# Altium PCB STM32F105 Devlopment Board.PcbDoc (part 2 of 2)
Units mm, origin at the board's own origin, x right, y up, seen from the top; angles counter-clockwise.
Board outline 85.07 x 64.6 mm, 4 copper layers (Signal, Int1 (GND), Int2 (PWR), GND), stack 1.371 mm thick; 98 components, 96 nets, 423 pads, 352 vias.
Unrouted connection lines stored in the file: 251.
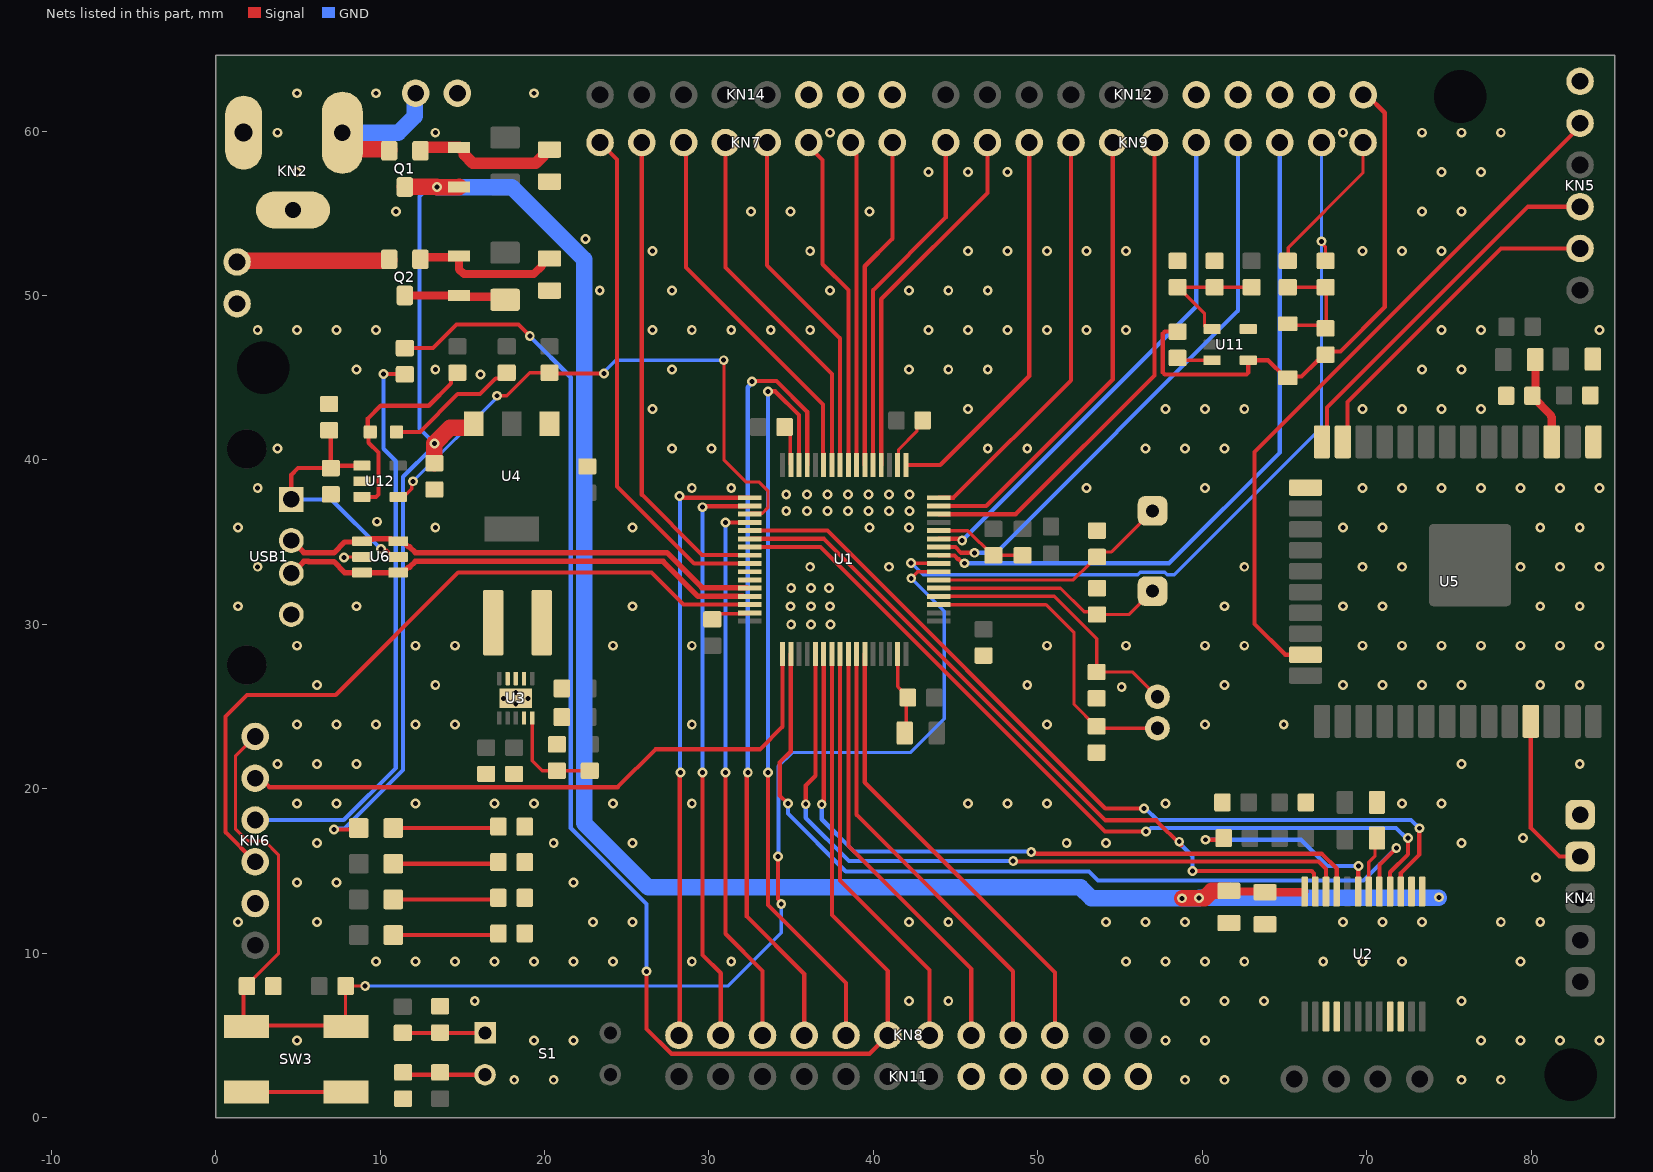
[diagram p4: the nets of this part, all layers, seen from the top]

## Via types
v1: diameter 0.6, hole 0.3, Signal to GND, 352 vias

## Nets (pads, with @x,y where several pads share a name; then routed paths per layer and width w, separated by ;. In a path a pad name is that pad's centre, name@x,y a point inside that pad or via, vN(x,y) a via of type N, cw(c..) or ccw(c..) an arc to the next point about the centre after c; other vN are vias at no path point) (continued)
ESP_TDI: KN5.4 U5.14 | length 22.7
  Signal w0.254: U5.14@67.28,41.1 67.58,41.4 67.58,43.18 79.8,55.4 KN5.4@82.975,55.4
ESP_TDO: KN5.2 U5.23 | length 42.5
  Signal w0.254: U5.23@66.28,28.155 65.045,28.155 63.183,30.017 63.183,40.483 82.975,60.275 KN5.2@82.975,60.48
ESP_TMS: KN5.5 U5.13 | length 20.6
  Signal w0.254: U5.13@68.55,41.1 68.823,41.373 68.823,43.523 78.16,52.86 KN5.5@82.975,52.86
ESP_TX: KN4.4 U5.35 | length 10.2
  Signal w0.254: U5.35@79.98,24.1 79.98,17.62 81.72,15.88 KN4.4@82.975,15.88
GND: C1.1 C2.1 C3.1 C4.1 C5.1 C6.1 C7.1 C8.1 C9.1 C10.1 C11.2 C12.2 C13.1 C14.1 C15.1 C16.1 C17.1 C18.1 C19.1 C20.1 C21.1 C22.1 C23.1 C24.1 C25.1 C26.1 C27.1 C30.1 C33.1 KN2.2 KN2.3 KN3.2 KN4.5 KN5.1 KN6.5 KN10.2 KN11.8 KN11.9 KN11.10 KN11.11 KN11.12 KN12.7 KN12.8 KN12.9 KN12.10 KN14.6 KN14.7 KN14.8 R1.1 R4.1 R6.1 R8.1 R9.1 R10.1 R11.1 R17.1 R18.1 R20.2 R22.2 R32.1 SW3.1 SW3.3 U1.12 U1.18 U1.31 U1.47 U1.63 U2.3 U2.4 U2.9 U2.10 U2.18 U3.3 U3.9 U3.11 U3.12 U3.13 U3.14 U3.15 U4.1 U5.1 U5.15 U6.2 U11.5 U12.2 USB1.4 | length 29.7
  Signal w0.2: v1(7.8,34.067) 7.833,34.1 U6.2@8.9,34.1 ; C4.1@30.2,30.3 30.55,30.65 32.425,30.65 U1.47@32.475,30.7 ; C6.1@34.6,42 34.937,41.663 34.937,39.737 U1.31@34.975,39.7 ; U1.63@41.475,28.2 41.475,26.215 42.1,25.59 C5.1@42.1,25.54 42,25.44 42,23.49 C8.1@41.9,23.39 ; U1.18@41.475,39.7 41.525,39.75 41.525,40.615 42.647,41.737 42.647,42.047 C3.1@43,42.4 ; U1.12@43.975,35.7 45.75,35.7 47.25,34.2 C10.1@47.3,34.2 C9.1@49.077,34.2 ; U2.18@70.125,13.75 70.125,15.525 70.5,15.9 70.5,16.875 C22.1@70.625,17
  Signal w0.254: SW3.3@1.875,1.55 SW3.1@7.925,1.55
  other v1: 18.155,2.3 20.555,2.3 58.955,2.3 61.355,2.3 75.755,2.3 78.155,2.3 4.955,4.7 19.355,4.7 21.755,4.7 57.755,4.7 60.155,4.7 76.955,4.7 79.355,4.7 81.755,4.7 84.155,4.7 15.755,7.1 42.155,7.1 44.555,7.1 58.955,7.1 61.355,7.1 63.755,7.1 75.755,7.1 9.755,9.5 12.155,9.5 14.555,9.5 16.955,9.5 19.355,9.5 21.755,9.5 24.155,9.5 28.955,9.5 31.355,9.5 55.355,9.5 57.755,9.5 60.155,9.5 62.555,9.5 67.355,9.5 69.755,9.5 72.155,9.5 79.355,9.5 1.355,11.9 6.155,11.9 22.955,11.9 25.355,11.9 42.155,11.9 44.555,11.9 54.155,11.9 56.555,11.9 58.955,11.9 68.555,11.9 70.955,11.9 73.355,11.9 78.155,11.9 80.555,11.9 4.955,14.3 7.355,14.3 21.755,14.3 80.3,14.6 6.155,16.7 20.555,16.7 25.355,16.7 51.755,16.7 54.155,16.7 75.755,16.7 79.5,17 4.955,19.1 7.355,19.1 12.155,19.1 16.955,19.1 19.355,19.1 24.155,19.1 28.955,19.1 45.755,19.1 48.155,19.1 50.555,19.1 57.755,19.1 72.155,19.1 74.555,19.1 3.755,21.5 6.155,21.5 8.555,21.5 75.755,21.5 82.955,21.5 4.955,23.9 7.355,23.9 9.755,23.9 12.155,23.9 14.555,23.9 28.955,23.9 50.555,23.9 60.155,23.9 64.955,23.9 55.1,26.2 6.155,26.3 13.355,26.3 49.355,26.3 61.355,26.3 68.555,26.3 70.955,26.3 73.355,26.3 75.755,26.3 80.555,26.3 82.955,26.3 4.955,28.7 12.155,28.7 14.555,28.7 24.155,28.7 28.955,28.7 50.555,28.7 55.355,28.7 60.155,28.7 62.555,28.7 69.755,28.7 72.155,28.7 74.555,28.7 76.955,28.7 79.355,28.7 81.755,28.7 84.155,28.7 35,30 36.2,30 37.4,30 1.355,31.1 8.555,31.1 25.355,31.1 34.955,31.1 36.2,31.1 37.355,31.1 61.355,31.1 68.555,31.1 70.955,31.1 80.555,31.1 82.955,31.1 35,32.2 36.2,32.2 37.3,32.2 2.555,33.5 36.155,33.5 40.955,33.5 62.555,33.5 69.755,33.5 72.155,33.5 79.355,33.5 81.755,33.5 84.155,33.5 1.355,35.9 13.355,35.9 25.355,35.9 39.755,35.9 42.155,35.9 68.555,35.9 70.955,35.9 80.555,35.9 82.955,35.9 9.806,36.243 34.7,36.9 35.95,36.9 37.2,36.9 38.45,36.9 39.7,36.9 40.95,36.9 42.2,36.9 34.7,37.9 35.95,37.9 37.2,37.9 38.45,37.9 39.7,37.9 40.95,37.9 42.2,37.9 2.555,38.3 28.955,38.3 31.355,38.3 52.955,38.3 60.155,38.3 69.755,38.3 72.155,38.3 74.555,38.3 76.955,38.3 79.355,38.3 81.755,38.3 84.155,38.3 3.755,40.7 27.755,40.7 30.155,40.7 46.955,40.7 49.355,40.7 56.555,40.7 58.955,40.7 61.355,40.7 26.555,43.1 45.755,43.1 57.755,43.1 60.155,43.1 62.555,43.1 69.755,43.1 72.155,43.1 74.555,43.1 76.955,43.1 16.1,45.2 8.555,45.5 13.355,45.5 27.755,45.5 42.155,45.5 44.555,45.5 46.955,45.5 73.355,45.5 75.755,45.5 2.555,47.9 4.955,47.9 7.355,47.9 9.755,47.9 26.555,47.9 28.955,47.9 31.355,47.9 33.755,47.9 36.155,47.9 43.355,47.9 45.755,47.9 48.155,47.9 50.555,47.9 52.955,47.9 55.355,47.9 74.555,47.9 76.955,47.9 84.155,47.9 23.357,50.3 27.755,50.3 37.355,50.3 42.155,50.3 44.555,50.3 46.955,50.3 26.555,52.7 36.155,52.7 45.755,52.7 48.155,52.7 50.555,52.7 52.955,52.7 55.355,52.7 69.755,52.7 72.155,52.7 74.555,52.7 22.499,53.444 10.955,55.1 32.555,55.1 34.955,55.1 39.755,55.1 73.355,55.1 75.755,55.1 4.955,57.5 43.355,57.5 45.755,57.5 48.155,57.5 74.555,57.5 76.955,57.5 3.755,59.9 13.355,59.9 37.355,59.9 68.555,59.9 73.355,59.9 75.755,59.9 78.155,59.9 4.955,62.3 9.755,62.3 19.355,62.3
HSE_IN: C11.1 U1.5 X1.1 | length 14.3
  Signal w0.2: U1.5@43.975,32.2 51.378,32.2 52.818,30.76 53.44,30.76 C11.1@53.6,30.6 55.555,30.6 X1.1@56.975,32.02
HSE_OUT: C12.1 U1.6 X1.2 | length 14.7
  Signal w0.2: U1.6@43.975,32.7 52.16,32.7 53.15,33.69 53.15,33.7 53.55,34.1 C12.1@53.6,34.1 53.905,34.405 54.48,34.405 X1.2@56.975,36.9
Li_FB: R6.2 R7.1 U3.10 | length 6.3
  Signal w0.2: U3.10@19.25,24.3 19.25,21.7 19.85,21.1 R6.2@20.75,21.1 R7.1@22.75,21.1
Li_Ion: D1.2 Q2.3 Z2.1 | length 6.2
  Signal w0.5: Q2.3@11.5,50 Z2.1@14.8,50 14.875,49.925 17.415,49.925 D1.2@17.6,49.74
LSE_IN: C13.2 U1.3 X2.1 | length 19
  Signal w0.2: U1.3@43.975,31.2 50.5,31.2 52.2,29.5 52.2,25.125 53.525,23.8 C13.2@53.575,23.8 53.695,23.68 X2.1@57.275,23.68
LSE_OUT: C14.2 U1.4 X2.2 | length 17
  Signal w0.2: U1.4@43.975,31.7 51,31.7 53.575,29.125 C14.2@53.575,27.1 55.775,27.1 X2.2@57.275,25.6
M_DRIV_STBY: R14.1 U2.19 | length 12.7
  Signal w0.254: v1(60.2,16.9) 61.2,16.9 R14.1@61.3,17 ; U2.19@69.475,13.75 69.487,13.763 69.487,15.287 v1(69.5,15.3)
  GND w0.254: v1(60.2,16.9) 66,16.9 67.6,15.3 v1(69.5,15.3)
"Motor Driver EN1": U1.38 U2.23 | length 44.5
  Signal w0.254: U1.38@32.475,35.2 36.993,35.2 54.111,18.082 57.196,18.082 v1@58.725,16.553 ; v1(59.4,15) 66.653,15 66.802,14.851 66.802,13.823 U2.23@66.875,13.75
  GND w0.254: v1@58.7,16.596 59.4,15.896 v1(59.4,15)
  other v1: 58.598,16.781
"Motor Driver EN2": U1.37 U2.15 | length 52.5
  Signal w0.254: U1.37@32.475,35.7 37.208,35.7 54.101,18.807 v1(56.462,18.807) ; U2.15@72.075,13.75 72.075,14.875 73.2,16 v1(73.2,17.6)
  GND w0.254: v1(56.462,18.807) 56.555,18.807 57.263,18.1 72.7,18.1 v1(73.2,17.6)
"Motor Driver IN1": U1.54 U2.21 | length 44
  Signal w0.254: v1@36.975,19.055 U1.54@36.975,28.2 ; v1(49.6,16.157) 49.666,16.09 49.876,16.09 49.922,16.044 67.27,16.044 68.175,15.139 U2.21@68.175,13.75
  GND w0.254: v1(36.856,19.055) 36.856,18.144 38.823,16.177 49.58,16.177 v1(49.6,16.157)
"Motor Driver IN2": U1.53 U2.22 | length 44.5
  Signal w0.254: v1(35.886,19.062) 35.886,20.203 36.475,20.792 U1.53@36.475,28.2 ; v1(48.5,15.6) 48.52,15.58 67.072,15.58 67.525,15.127 U2.22@67.525,13.75
  GND w0.254: v1(35.886,19.062) 35.886,18.234 38.52,15.6 v1(48.5,15.6)
"Motor Driver IN3": U1.50 U2.17 | length 52.8
  Signal w0.254: v1(34.8,19.1) 34.3,19.6 34.3,21.6 34.975,22.275 U1.50@34.975,28.2 ; U2.17@70.775,13.75 70.775,15.375 v1(71.8,16.4)
  GND w0.254: v1(34.8,19.1) 34.8,18.493 38.316,14.977 53.106,14.977 53.66,14.423 69.809,14.423 v1@71.786,16.4
"Motor Driver IN4": U1.39 U2.16 | length 51.2
  Signal w0.254: U1.39@32.475,34.7 36.787,34.7 54.087,17.4 v1(56.576,17.4) ; U2.16@71.425,13.75 71.425,14.925 72.512,16.012 v1@72.512,17
  GND w0.254: v1(56.576,17.4) 56.669,17.4 56.891,17.621 71.785,17.621 72.406,17 v1(72.5,17)
NetC25_2: C25.2 R16.1 U5.3 | length 5.6
  Signal w0.5: R16.1@80.25,46.1 80.262,46.087 80.262,44.088 C25.2@80.075,43.9 80.075,43.85 81.208,42.717 81.208,42.628 81.25,42.586 U5.3@81.25,41.1
NetC33_2: C33.2 R31.1 R32.2 U11.1 | length 8.3
  Signal w0.2: C33.2@58.5,50.5 C33.2@58.55,50.5 ; U11.1@60.631,47.996 U11.1@60.597,47.962 60.332,47.962 60.132,48.162 60.132,48.918 C33.2@58.55,50.5 ; R32.2@60.631,50.381 R32.2@60.75,50.5 ; R31.1@63,50.5 R32.2@60.75,50.5 ; C33.2@58.55,50.5 R32.2@60.75,50.5
NetKN2_1: KN2.1 KN10.1 Q1.2 | length 9.8
  Signal w1: KN2.1@7.7,59.9 7.7,59.593 8.393,58.9 10.55,58.9 Q1.2@10.55,58.8
  GND w1: KN2.1@7.7,59.9 11.1,59.9 12.1,60.9 12.1,62.24 KN10.1@12.16,62.3
NetKN3_1: KN3.1 Q2.2 | length 9.4
  Signal w1: KN3.1@1.3,52.04 1.38,52.12 10.55,52.12 Q2.2@10.55,52.2
NetL2_1: L2.1 U3.4
NetL2_2: L2.2 U3.2
NetLD1_1: LD1.1 R4.2 | length 6.4
  Signal w0.254: LD1.1@10.804,11.1 17.095,11.1 R4.2@17.195,11.2
NetLD3_1: LD3.1 R9.2 | length 6.4
  Signal w0.254: LD3.1@10.804,13.27 17.095,13.27 R9.2@17.195,13.37
NetLD4_1: LD4.1 R10.2 | length 6.4
  Signal w0.254: LD4.1@10.804,17.61 17.106,17.61 R10.2@17.195,17.7
NetLD5_1: LD5.1 R11.2 | length 6.4
  Signal w0.254: LD5.1@10.804,15.44 17.095,15.44 R11.2@17.195,15.54
NetLD8_1: LD8.1 R35.2 U12.3 | length 12.8
  Signal w0.254: U12.3@8.9,37.75 9.751,37.75 9.9,37.899 9.9,40.443 9.3,41.043 9.3,41.6 LD8.1@9.4,41.7 9.252,41.848 9.252,42.513 10.034,43.296 12.955,43.296 14.319,44.659 14.319,44.927 14.692,45.3 R35.2@14.7,45.3
NetLD8_2: LD8.2 R36.2 | length 8.2
  Signal w0.254: LD8.2@11,41.7 12.416,41.7 14.716,44 16.076,44 17.027,44.951 17.351,44.951 R36.2@17.7,45.3
NetQ1_1: Q1.1 R8.2 Z1.2 | length 9.1
  Signal w0.7: Q1.1@12.45,58.8 12.45,58.85 12.6,59 Z1.2@14.8,59 14.825,58.975 15.125,58.975 15.125,58.557 15.634,58.048 19.466,58.048 19.95,58.532 19.95,58.725 20.1,58.875 R8.2@20.3,58.875
NetQ2_1: Q2.1 R1.2 Z2.2 | length 9.4
  Signal w0.5: Q2.1@12.45,52.2 12.575,52.325 14.725,52.325 Z2.2@14.8,52.4 14.8,51.593 15.093,51.3 19.344,51.3 19.85,51.806 19.85,52 20.1,52.25 R1.2@20.3,52.25
NetR3_2: R3.2 R18.2 S1.2A | length 5
  Signal w0.254: R18.2@11.4,2.75 11.54,2.61 S1.2A@16.38,2.61
NetR5_2: R5.2 R17.2 S1.1A | length 5
  Signal w0.254: R5.2@11.375,5.15 S1.1A@16.38,5.15
NetR29_1: pad.6 R29.1 R30.1 U11.4 Z3.2 | length 33.4
  Signal w0.254: R29.1@58.5,47.8 57.717,47.8 57.6,47.683 57.6,45.317 57.717,45.2 62.68,45.2 62.797,45.317 U11.4@62.797,46.062 63.988,46.062 65.05,45 Z3.2@65.2,45 65.269,45.069 66.032,45.069 66.99,46.027 67.127,46.027 67.7,46.6 68.4,46.6 71.1,49.3 71.1,61.114 70.014,62.2 pad.6@69.795,62.2
NetR29_2: R29.2 U11.3 | length 2.2
  Signal w0.2: R29.2@58.5,46.2 58.638,46.062 U11.3@60.597,46.062
NRST: C15.2 KN6.1 R12.1 SW3.2 SW3.4 U1.7 | length 89.9
  Signal w0.2: C15.2@1.9,8 1.9,8.05 3.815,9.965 3.815,16.001 2.992,16.824 1.95,16.824 1.2,17.574 1.2,21.98 KN6.1@2.4,23.18 ; SW3.2@7.925,5.55 7.9,5.575 R12.1@7.9,8 v1(9.092,8) ; v1(42.3,32.8) 42.7,33.2 U1.7@43.975,33.2
  Signal w0.254: SW3.4@1.875,5.55 SW3.4@1.927,5.55 ; C15.2@1.9,8 1.7,7.8 1.7,5.877 1.977,5.6 7.875,5.6 SW3.2@7.9,5.575 ; v1@34.19,15.867 34.19,13.298 34.394,13.094 v1(34.394,13)
  GND w0.2: v1(9.092,8) 31.153,8 34.394,11.241 v1(34.394,13) ; 34.207,21.352 34.223,21.367 35.056,22.2 42.245,22.2 44.3,24.255 44.3,30.8 v1(42.3,32.8)
  GND w0.254: v1(34.198,15.875) 34.223,15.9 34.223,21.367 34.3,21.444
OSC_IN: pad.7 R28.2 | length 9.1
  Signal w0.2: R28.2@65.2,52.1 65.23,52.13 65.23,52.91 69.775,57.455 pad.7@69.775,59.3
OSC_OUT: R28.1 R30.2 R33.2 Z3.1 | length 7.2
  Signal w0.2: Z3.1@65.2,48.277 65.294,48.182 67.318,48.182 R30.2@67.5,48 67.537,48.037 67.537,50.462 R33.2@67.5,50.5 65.25,50.5 R28.1@65.2,50.5
PA0: KN9.5 U1.14 | length 30.8
  Signal w0.254: U1.14@43.982,36.693 48.652,36.693 57.095,45.136 KN9.5@57.095,59.3
PA1: KN9.6 U1.15 | length 28.2
  Signal w0.254: U1.15@43.975,37.2 46.862,37.2 54.555,44.893 KN9.6@54.555,59.3
PA2: KN9.7 U1.16 | length 25.5
  Signal w0.254: U1.16@43.975,37.7 43.978,37.703 44.878,37.703 52.015,44.84 KN9.7@52.015,59.3
PA3: KN9.8 U1.17 | length 23.9
  Signal w0.254: U1.17@41.975,39.7 44.066,39.7 49.475,45.109 KN9.8@49.475,59.3
PA4: KN9.9 U1.20 | length 22.3
  Signal w0.254: U1.20@40.475,39.7 40.475,49.775 46.935,56.235 KN9.9@46.935,59.3
PA5: KN9.10 U1.21 | length 21.4
  Signal w0.254: U1.21@39.975,39.7 39.975,50.313 44.395,54.733 KN9.10@44.395,59.3
PA6: KN7.8 U1.22 | length 20.3
  Signal w0.254: U1.22@39.475,39.7 39.475,51.775 41.155,53.455 KN7.8@41.155,59.3
PA7: KN7.7 U1.23 | length 19.7
  Signal w0.254: KN7.7@38.615,59.3 38.615,58.915 38.972,58.558 U1.23@38.972,39.703
PA8: KN7.1 U1.41 | length 31.3
  Signal w0.254: KN7.1@23.375,59.3 24.41,58.265 24.41,38.39 29.1,33.7 U1.41@32.475,33.7
PB0: KN7.4 U1.26 | length 22.3
  Signal w0.254: KN7.4@30.995,59.3 30.995,51.705 37.475,45.225 U1.26@37.475,39.7
PB1: KN7.3 U1.27 | length 23.1
  Signal w0.254: KN7.3@28.455,59.3 28.6,59.155 28.6,51.7 36.936,43.364 36.936,40.434 36.952,40.418 36.952,39.723 U1.27@36.975,39.7
PB3: KN8.6 R13.1 U1.55 | length 93.9
  Signal w0.254: R13.1@11.5,46.8 13.217,46.8 14.653,48.236 18.41,48.236 v1(19.103,47.543) ; v1(26.2,8.9) 26.2,5.398 27.713,3.885 39.76,3.885 KN8.6@40.875,5 40.875,8.925 37.475,12.325 U1.55@37.475,28.2
  GND w0.254: v1(19.103,47.543) 19.103,47.516 21.592,45.028 21.592,17.61 26.2,13.001 v1(26.2,8.9)
PB4: KN8.7 U1.56 | length 25.5
  Signal w0.254: U1.56@37.975,28.2 37.975,14.425 43.415,8.985 KN8.7@43.415,5
PB5: KN8.8 U1.57 | length 26.3
  Signal w0.254: U1.57@38.475,28.2 38.475,16.525 45.955,9.045 KN8.8@45.955,5
PB6: KN8.9 U1.58 | length 27.1
  Signal w0.254: U1.58@38.975,28.2 38.975,18.425 48.495,8.905 KN8.9@48.495,5
PB7: KN8.10 U1.59 | length 28
  Signal w0.254: U1.59@39.475,28.2 39.475,20.393 51.035,8.833 KN8.10@51.035,5
PB10: KN8.4 U1.29 | length 48.7
  Signal w0.254: v1(32.36,20.995) 32.3,20.936 32.3,12.236 35.795,8.741 KN8.4@35.795,5 ; v1(32.617,44.771) 32.646,44.8 34.1,44.8 35.975,42.925 U1.29@35.975,39.7
  GND w0.254: v1(32.36,20.995) 32.36,44.421 32.617,44.678 v1(32.617,44.771)
PB11: KN8.5 U1.30 | length 46.7
  Signal w0.254: v1(33.583,20.988) 33.583,12.931 38.335,8.179 KN8.5@38.335,5 ; v1(33.583,44.17) 34.03,44.17 35.475,42.725 U1.30@35.475,39.7
  GND w0.254: v1(33.583,20.988) v1(33.583,44.17)
PB12: KN8.1 U1.33 | length 37.2
  Signal w0.254: KN8.1@28.175,5 28.217,5.042 28.217,20.952 v1(28.258,20.994) ; v1(28.2,37.8) 28.294,37.8 28.394,37.7 U1.33@32.475,37.7
  GND w0.254: v1(28.2,37.8) 28.229,37.771 28.229,21.023 v1(28.258,20.994)
PB13: KN8.2 U1.34 | length 35.5
  Signal w0.254: v1(29.6,21) 29.6,9.9 30.715,8.785 KN8.2@30.715,5 ; v1(29.6,37.123) 29.654,37.177 32.452,37.177 U1.34@32.475,37.2
  GND w0.254: v1(29.6,21) v1(29.6,37.123)
PB15: KN8.3 U1.36 | length 33.6
  Signal w0.254: v1@31,21.1 31,11.181 33.255,8.926 KN8.3@33.255,5 ; v1(31,36.2) U1.36@32.475,36.2
  GND w0.254: v1@31,21.1 v1(31,36.2)
  other v1: 31,20.991
PC0: KN9.1 R33.1 U1.8 | length 49.4
  Signal w0.2: v1(42.294,33.741) 42.314,33.721 43.954,33.721 U1.8@43.975,33.7 ; v1(67.255,53.296) 67.255,53.187 67.5,52.942 R33.1@67.5,52.1
  GND w0.2: v1(42.294,33.741) 43.019,33.015 56.081,33.015 56.235,33.17 57.715,33.17 57.869,33.015 58.297,33.015 67.255,41.973 v1(67.255,53.296) KN9.1@67.255,59.3
PC1: KN9.2 U1.9 | length 42.6
  Signal w0.254: U1.9@43.975,34.2 43.998,34.177 44.936,34.177 45.159,33.954 45.2,33.954 45.438,33.717 v1(45.531,33.717)
  GND w0.254: v1(45.531,33.717) 57.983,33.717 64.715,40.449 KN9.2@64.715,59.3
PC2: KN9.3 U1.10 | length 34.7
  Signal w0.254: U1.10@43.975,34.7 44.984,34.7 45.333,34.351 v1(46.141,34.351)
  GND w0.254: v1(46.141,34.351) 47.451,34.351 62.175,49.075 KN9.3@62.175,59.3
PC3: KN9.4 U1.11 | length 31.6
  Signal w0.254: U1.11@43.975,35.2 45.206,35.2 45.306,35.1 v1(45.4,35.1)
  GND w0.254: v1(45.4,35.1) 59.635,49.335 KN9.4@59.635,59.3
PC4: KN7.6 U1.24 | length 20.6
  Signal w0.254: KN7.6@36.075,59.3 36.075,59.065 36.9,58.24 36.9,51.9 38.475,50.325 U1.24@38.475,39.7
PC5: KN7.5 U1.25 | length 21.4
  Signal w0.254: KN7.5@33.535,59.3 33.535,51.835 37.975,47.395 U1.25@37.975,39.7
PC9: KN7.2 U1.40 | length 29.5
  Signal w0.254: KN7.2@25.915,59.3 25.915,37.885 29.577,34.223 32.452,34.223 U1.40@32.475,34.2
SWCLK: KN6.2 U1.49 | length 38.2
  Signal w0.254: KN6.2@2.4,20.64 2.716,20.64 3.26,20.096 24.447,20.096 26.751,22.4 33.1,22.4 34.475,23.775 U1.49@34.475,28.2
SWDIO: KN6.4 U1.46 | length 45.9
  Signal w0.254: KN6.4@2.4,15.56 0.6,17.36 0.6,24.4 1.9,25.7 7.3,25.7 14.747,33.147 26.512,33.147 28.459,31.2 U1.46@32.475,31.2
SWO: KN6.3 R13.2 | length 35.5
  Signal w0.254: v1(10.198,45.231) 11.469,45.231 R13.2@11.5,45.2
  GND w0.254: KN6.3@2.4,18.1 7.786,18.1 10.955,21.269 10.955,39.92 10.198,40.677 v1(10.198,45.231)
USB_ID: U1.43
USB_N: U1.44 U6.1 U6.6 USB1.2 | length 29.6
  Signal w0.331: USB1.2@4.6,35.1 4.626,35.1 5.361,34.366 5.855,34.366 5.879,34.342 7.184,34.342 7.848,35.007 8.857,35.007 9.034,35.184 9.52,35.184 9.528,35.192 10.658,35.192 10.8,35.05 11.4,35.05 11.734,34.716 11.796,34.716 12.146,34.366 27.434,34.366 29.566,32.234 32.283,32.234 U1.44@32.283,32.216
USB_P: U1.45 U6.3 U6.4 USB1.3 | length 29.2
  Signal w0.331: USB1.3@4.6,33.1 4.626,33.1 5.361,33.834 5.635,33.834 5.659,33.811 7.185,33.811 7.846,33.15 8.588,33.15 U6.3@8.594,33.156 ; U6.3@8.6,33.15 U6.4@11.1,33.15 11.4,33.15 11.734,33.484 11.796,33.484 12.146,33.834 27.214,33.834 29.346,31.703 U1.45@32.063,31.703
USB_PSO: R34.2 U1.35 U12.4 | length 35.4
  Signal w0.2: U12.4@11.1,37.75 11.425,37.75 11.923,38.248 11.923,38.623 v1(12,38.7) ; v1(17.109,43.9) 17.7,43.9 19.1,45.3 R34.2@20.3,45.3 ; v1(30.895,46.063) 30.914,46.044 30.914,39.986 32.238,38.662 33.037,38.662 33.583,38.116 33.583,37.08 33.254,36.75 32.525,36.75 U1.35@32.475,36.7
  Signal w0.254: R34.2@20.3,45.3 20.342,45.258 v1(23.625,45.258)
  GND w0.2: v1(12,38.7) 17.109,43.809 v1(17.109,43.9) ; v1(23.625,45.258) 23.625,45.366 24.322,46.063 v1(30.895,46.063)
V_IN: C1.2 C20.2 C26.2 LD4.2 Q1.3 U2.13 U2.14 U2.24 U4.3 Z1.1 | length 158.7
  Signal w0.254: v1(7.2,17.523) 8.616,17.523 LD4.2@8.704,17.61
  Signal w0.5: C1.2@61.612,13.788 61.65,13.75 63.775,13.75 C26.2@63.812,13.713 66.187,13.713 U2.24@66.225,13.75
  Signal w1: Q1.3@11.5,56.6 13.454,56.6 v1(13.464,56.59) 14.79,56.59 Z1.1@14.8,56.6 ; C20.2@13.3,39.8 v1(13.3,41) 14.25,41.95 15.6,41.95 15.7,42.05 U4.3@15.7,42.2 ; v1(58.773,13.339) 58.786,13.351 60.136,13.351 60.572,13.788 C1.2@61.612,13.788
  GND w0.254: v1(7.2,17.523) 7.25,17.573 7.83,17.573 11.4,21.143 11.4,38.977 13.15,40.726 13.15,40.769 13.3,40.919 v1(13.3,41) 12.4,41.9 12.4,56.02 12.97,56.59 v1(13.464,56.59)
  GND w1: v1(13.464,56.59) 18.01,56.59 22.407,52.193 22.407,17.893 26.3,14 52.6,14 53.249,13.351 v1@58.786,13.351 ; v1(58.773,13.339) v1@58.786,13.351 ; v1@74.379,13.379 59.832,13.379 v1(59.804,13.351) v1@58.786,13.351
  other v1: 74.4,13.4
VBUS: C27.2 C30.2 U6.5 U12.1 USB1.1 | length 16.3
  Signal w0.2: v1(10.052,34.575) 10.128,34.498 10.402,34.498 10.8,34.1 U6.5@11.1,34.1
  Signal w0.254: USB1.1@4.6,37.6 4.6,39.1 5,39.5 C30.2@7,39.5 ; C27.2@6.9,41.8 7,41.7 C30.2@7,39.5 ; U12.1@8.9,39.65 7.15,39.65 C30.2@7,39.5
  GND w0.254: USB1.1@4.6,37.6 7.027,37.6 v1(10.052,34.575)
VBUS_Sense: U1.42
pads on no net: U5.4 U5.5 U5.6 U5.7 U5.8 U5.9 U5.10 U5.11 U5.12 U5.17 U5.18 U5.19 U5.20 U5.21 U5.22 U5.26 U5.27 U5.28 U5.29 U5.32 U5.33 U5.36 U5.37 U5.38 U5.39 USB1.

## Polygon pours and split planes (outlines as drawn)
+5V on Signal "NONET_L02_P-001" (solid, pour order 63): 17,43.3 19.1,43.3 cw(c19.1,42.7) 19.7,42.7 19.7,38.5 22.6,38.5 cw(c22.6,37.791) 23.309,37.791 23.309,35.609 cw(c22.5,35.609) 22.5,34.8 17,34.8 cw(c17,35.5) 16.3,35.5 16.3,42.6 cw(c17,42.6)
GND on Signal "GND PLANE" (solid, remove dead copper, pour order 24): 0,64.6 85.075,64.6 85.075,0 -0.005,0
"DC MOTOR +1" on Signal "NONET_L02_P-001" (solid, pour order 15): 64.111,0.505 67.328,0.505 67.328,7.425 64.06,7.425 64.06,4.675
V_IN on Signal "V_IN_L01_P019" (solid, pour order 19): 72.362,14.863 74.837,14.863 74.837,11.688 72.812,11.688 72.387,12.113
NetL2_2 on Signal "NONET_L02_P-001" (solid, pour order 53): 18.584,26.27 20.684,26.27 20.684,31.916 ccw(c20.2,31.916) 20.2,32.4 19.04,32.4 ccw(c19.04,31.944) 18.584,31.944
+3.3V on Signal "NONET_L02_P-001" (solid, pour order 65): 19.033,27.438 24.3,27.438 24.3,22.1 21.758,22.1 21.758,26.3 19.028,26.3
NetL2_1 on Signal "NONET_L02_P-001" (solid, pour order 52): 17.948,26.209 16.048,26.209 16.048,31.848 cw(c16.592,31.848) 16.592,32.392 17.308,32.392 cw(c17.308,31.752) 17.948,31.752
3V_REG_IN on Signal "NONET_L02_P-001" (solid, pour order 64): 17.455,26.845 17.455,24.8 18.8,24.8 18.8,22.3 cw(c18.218,22.3) 18.218,21.718 16.282,21.718 cw(c16.282,22.232) 15.768,22.232 15.768,26.768 cw(c16.15,26.768) 16.15,27.15 17.15,27.15 cw(c17.15,26.845)
GND on Signal "NONET_L02_P-001" (solid, pour order 51): 15.519,20.9 15.519,29.383 21.3,29.383 21.3,25.692 19.924,25.692 19.924,20.9
"DC MOTOR -2" on Signal "NONET_L02_P-001" (solid, pour order 16): 69.191,0.505 72.408,0.505 72.408,6.8 69.14,6.8 69.14,4.675
"DC MOTOR -1" on Signal "NONET_L02_P-001" (solid, pour order 12): 66.651,0.505 69.868,0.505 69.868,6.7 66.6,6.7 66.6,4.675
"DC MOTOR +2" on Signal "NONET_L02_P-001" (solid, pour order 17): 71.731,0.505 74.948,0.505 74.948,7.425 71.68,7.425 71.68,4.675
+5V on Int2 (PWR) "+5V POUR" (solid, pour order 57): 2.375,64.2 82.675,64.2 cw(c82.675,62.2) 84.675,62.2 84.675,2.4 cw(c82.675,2.4) 82.675,0.4 2.375,0.4 cw(c2.375,2.4) 0.375,2.4 0.375,62.2 cw(c2.375,62.2)
+3.3V on Int2 (PWR) "+3.3V" (solid, pour order 59): 25.889,55.05 24.05,55.05 ccw(c24.05,53) 22,53 22,14.6 ccw(c23.95,14.6) 23.95,12.65 25.869,12.65 77.85,12.65 ccw(c77.85,14.25) 79.45,14.25 79.45,53.507 ccw(c77.907,53.507) 77.907,55.05
GND on Int1 (GND) "GND PLANE" (solid, pour order 61): 0,64.6 85.075,64.6 85.075,0 -0.005,0
GND on GND "GND PLANE" (solid, remove dead copper, pour order 62): 0,64.6 85.075,64.6 85.075,0 -0.005,0

## Keep-outs
Keep-Out Layer:
  the board outline again, w0.254

## Other copper
Signal:
  region net GND: 19.162,25.924 19.487,25.924 19.5,25.911 19.5,25.051 19.478,25.072 19.177,25.072

## Silkscreen, mask and mechanical layers (free items; w line width, h text height)
Top Overlay:
  text "GND" at 58.803,63.661 h1
  text "5V" at 43.98,63.608 h1
  text "5V" at 46.28,63.608 h1
  text "3.3V" at 48.794,63.593 h1
  text "3.3V" at 51.494,63.593 h1
  text "3.3V" at 53.794,63.593 h1
  text "3.3V" at 56.51,63.585 h1
  text "GND" at 61.378,63.593 h1
  text "GND" at 64.078,63.593 h1
  text "GND" at 66.678,63.593 h1
  text "5V" at 22.74,63.488 h0.64
  text "5V" at 24.662,63.488 h0.64
  text "3.3V" at 26.585,63.488 h0.64
  text "3.3V" at 29.671,63.488 h0.64
  text "3.3V" at 32.757,63.488 h0.64
  text "GND" at 35.843,63.488 h0.64
  text "GND" at 38.4,63.488 h0.64
  text "GND" at 40.957,63.488 h0.64
  text "ADC" at 71.008,62.95 h1
  text "GPIO" at 18.051,62.85 h1
  text "GND" at 78.834,62.4 h1
  text "TD0" at 78.809,59.825 h1
  text "TCK" at 78.834,57.375 h1
  text "OSC" at 72.55,56.984 h1 r90
  text "PC1" at 65.3,55.717 h1 r90
  text "PA0" at 57.844,55.517 h1 r90
  text "PC0" at 67.2,55.509 h1 r90
  text "PC3" at 60.125,55.459 h1 r90
  text "PC2" at 62.6,55.434 h1 r90
  text "PA1" at 55.575,55.417 h1 r90
  text "PA8" at 23.959,55.392 h1 r90
  text "PC9" at 26.499,55.392 h1 r90
  text "PB1" at 29.039,55.392 h1 r90
  text "PB0" at 31.579,55.392 h1 r90
  text "PC5" at 34.119,55.392 h1 r90
  text "PC4" at 36.659,55.392 h1 r90
  text "PA7" at 39.231,55.392 h1 r90
  text "PA6" at 41.739,55.392 h1 r90
  text "PA2" at 52.851,55.389 h1 r90
  text "PA5" at 45,55.309 h1 r90
  text "PA4" at 47.4,55.234 h1 r90
  text "PA3" at 50.2,55.234 h1 r90
  text "TDI" at 78.834,55 h1
  text "TMS" at 78.584,52.45 h1
  text "VIN" at 3.051,52.05 h1
  text "+3.3V" at 77.751,50.85 h1
  text "GND" at 3.334,49.075 h1
  text "STM32" at 6.65,32.416 h1 r270
  text "SWD" at 0.87,24.65 h1
  text "VIN" at 12.746,18.05 h1
  text "GND" at 78.817,17.95 h0.8
  text "+5V" at 12.593,15.75 h1
  text "TX" at 79.317,15.45 h0.8
  text "+3.3V" at 12.579,13.65 h1
  text "RX" at 79.517,12.95 h0.8
  text "MCU" at 12.727,11.45 h1
  text "DTR" at 78.717,10.45 h0.8
  text "BOOT 1 | BOOT0" at 18.768,7.693 h1
  text "+3.3V" at 77.351,7.65 h0.8
  text "I2S WS" at 28.75,6.684 h1 r90
  text "I2S CK" at 30.75,6.651 h1 r90
  text "I2S2 SD" at 33.85,6.506 h1 r90
  text "I2C SDA" at 36.189,6.506 h1 r90
  text "I2C SCL" at 38.814,6.506 h1 r90
  text "SPI SCK" at 41.327,6.506 h1 r90
  text "SPI MISO" at 43.86,6.506 h1 r90
  text "SPI MOSI" at 46.51,6.506 h1 r90
  text "UART TX" at 48.975,6.506 h1 r90
  text "UART RX" at 51.375,6.506 h1 r90
  text "CAN N" at 54.45,6.285 h1 r90
  text "CAN P" at 56.75,6.285 h1 r90
  text "1+" at 64.675,3.775 h0.8
  text "1-" at 67.575,3.775 h0.8
  text "2-" at 70.197,3.775 h0.8
  text "2+" at 73.017,3.775 h0.8
  text "COMM" at 26.775,1.754 h1 r90
  text "MOTOR" at 63.65,1.285 h1 r90
  text "5V" at 29.952,0.72 h0.64
  text "5V" at 32.492,0.72 h0.64
  text "5V" at 27.615,0.638 h0.64
  text "3.3V" at 34.451,0.638 h0.64
  text "3.3V" at 37.251,0.638 h0.64
  text "3.3V" at 40.051,0.638 h0.64
  text "3.3V" at 42.751,0.638 h0.64
  text "GND" at 45.58,0.638 h0.64
  text "GND" at 48.03,0.638 h0.64
  text "GND" at 50.48,0.638 h0.64
  text "GND" at 52.93,0.638 h0.64
  text "GND" at 55.38,0.638 h0.64

## Text inside footprints (layer, text, board x,y; h text height)
U5: Mechanical 10 "KEEPOUT ZONE" at 87.854,37.861 h1.52 r270